# Altium PCB MB_SpectrumAnalyzerB.PcbDoc (part 2 of 3)
Units mil, origin at the board's own origin, x right, y up, seen from the top; angles counter-clockwise.
Board outline 6149 x 3004 mil, 2 copper layers (Top Layer, Bottom Layer); 237 components, 180 nets, 644 pads, 101 vias.
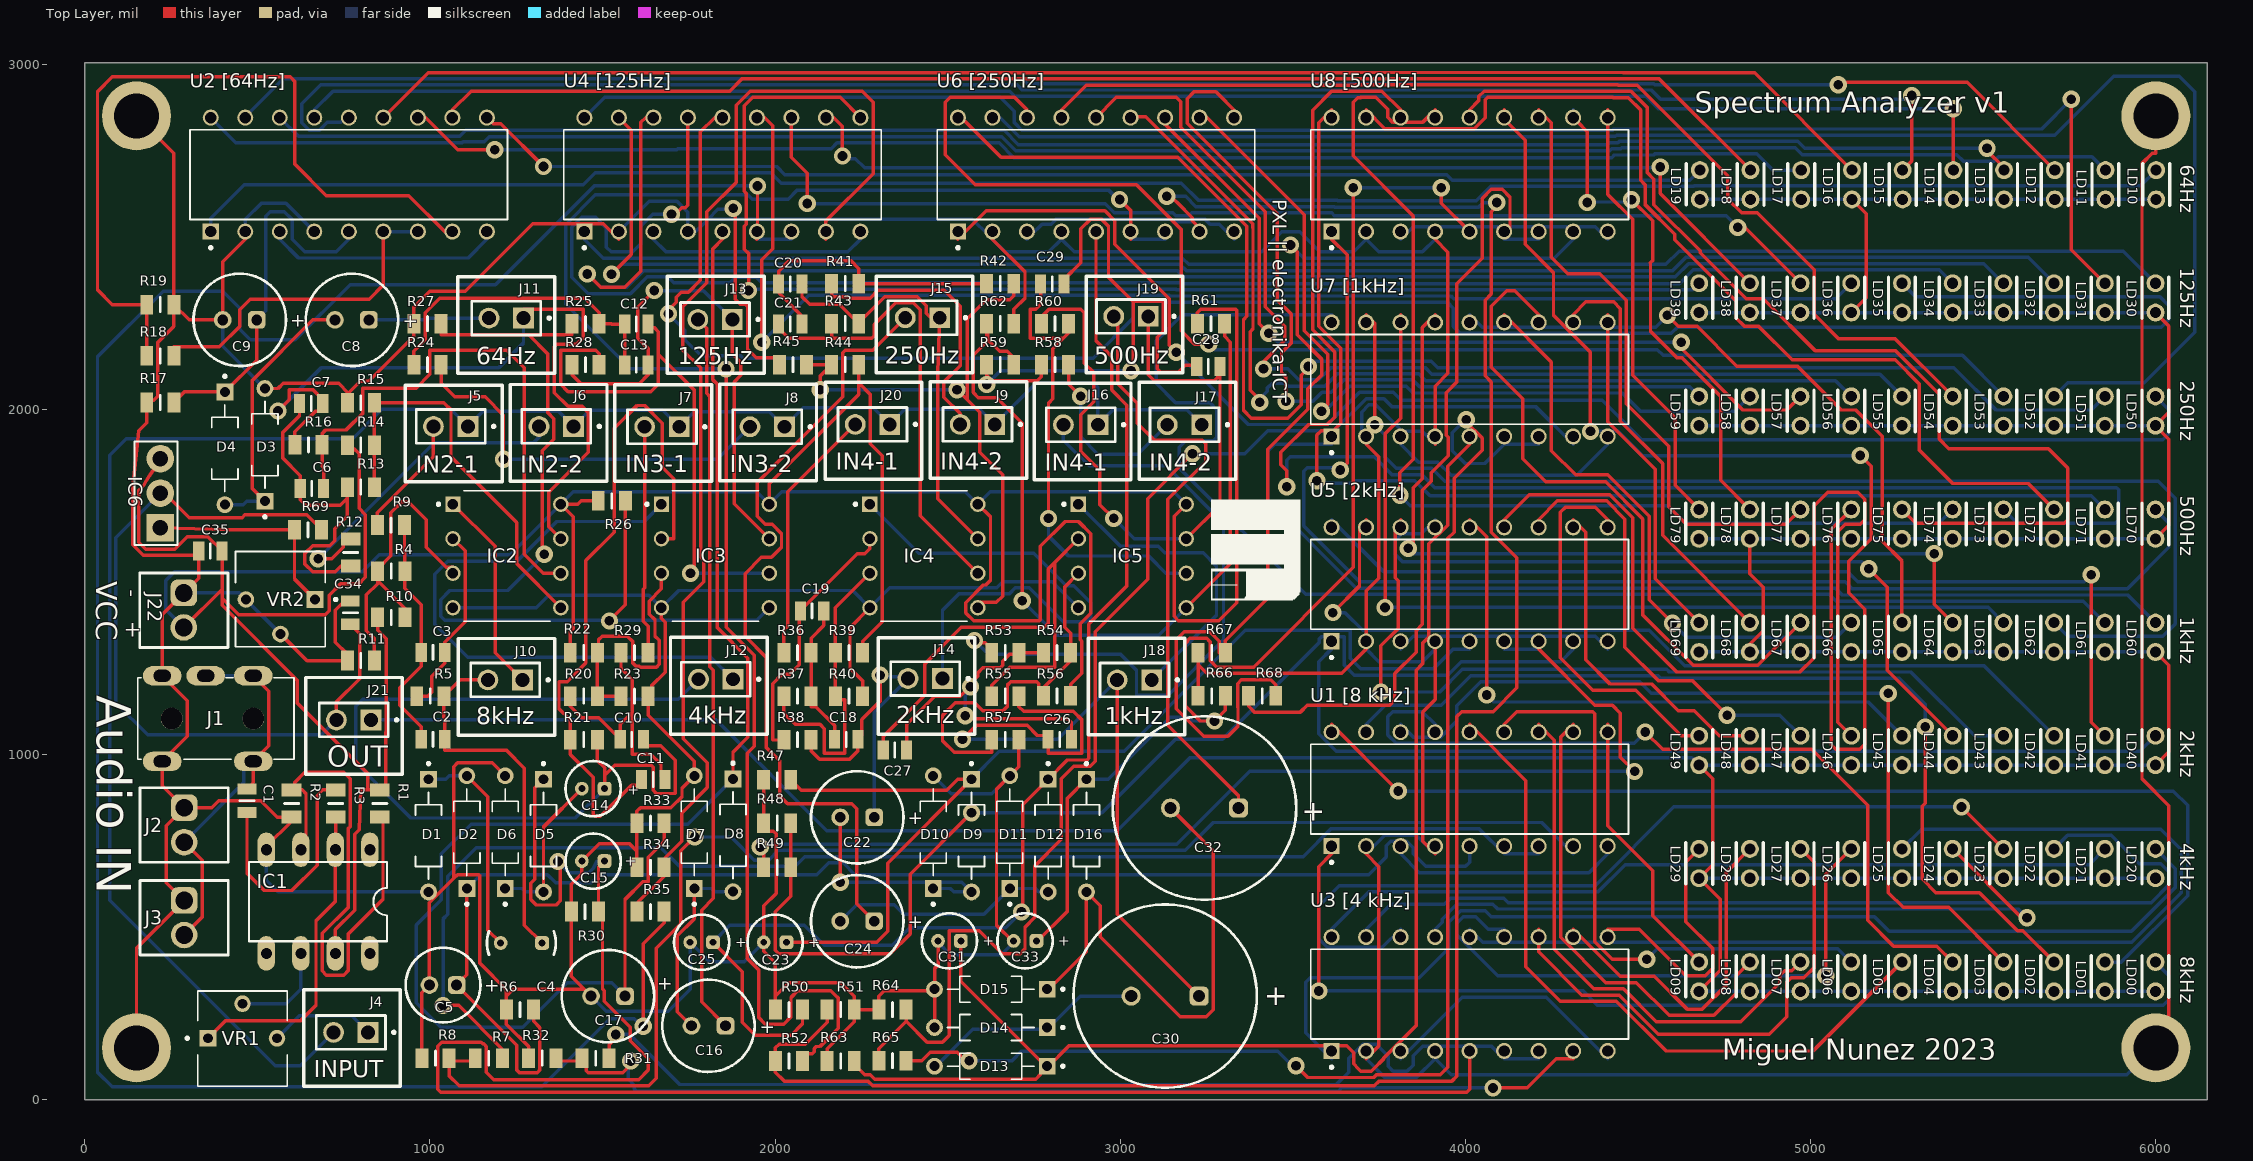
[diagram p0: Top Layer view]

## Via types
v1: diameter 50, hole 28, Top Layer to Bottom Layer, 101 vias

## Nets (pads, with @x,y where several pads share a name; then routed paths per layer and width w, separated by ;. In a path a pad name is that pad's centre, name@x,y a point inside that pad or via, vN(x,y) a via of type N, cw(c..) or ccw(c..) an arc to the next point about the centre after c; other vN are vias at no path point) (continued)
GND: (continued)
  Bottom Layer w10: J22.1@287,1468 448,1468 VR2.3@467,1449 VR2.2@567,1349 ; C9.2@399.79,2259 399.79,2182.44 D3.A@522,2060.23 ; 465,2515 465,2550 512,2597 583,2597 665,2515 ; IC1.4@526,724 526,635.77 560,601.77 D1.A@996,601.77 ; IC2.4@1066.7,1425 1308,1425 1344,1461 1634.7,1461 IC3.4@1670.7,1425 1720.7,1475 2224.7,1475 IC4.4@2274.7,1425 2332.7,1483 2642,1483 2660,1501 2802.7,1501 IC5.4@2878.7,1425 ; C17.2@1466.79,300 1510.79,256 1690,256 1754,320 C25.2@1754,456 1810,400 1911,400 C23.2@1967,456 ; 1558.58,2503.75 1558.58,2526.25 1635.33,2603 1715.74,2603 1747.33,2571.41 1747.33,2515 1747.33,2492.5 1758.58,2503.75 1805.83,2551 ; v1(1879,2582) 1876.17,2579.17 1834,2579.17 1805.83,2551 ; D10.A@2458,938.23 2510.23,886 2627.77,886 D11.A@2680,938.23 ; C31.2@2472,456 2508,420 2655,420 C33.2@2691,456 ; 3712,118.5 3766.23,64.27 3857.77,64.27 3912,118.5 3958.5,72 5915.37,72 5993.37,150 pad.29@6000,150 ; 3712,712 3766.23,766.23 3857.77,766.23 3912,712 ; 3712,1305.5 3748.5,1269 3875.5,1269 3912,1305.5 ; 3712,1899 3712,1925.23 3699,1938.23 3699,1992 3720,2013 3740.23,2013 3817.23,1936 3875,1936 3912,1899 ; 3912,2492.5 3875.5,2456 3748.5,2456 3712,2492.5 3675.77,2456.27 3577.73,2456.27 3520,2514 3468,2514 3410,2456 2866.17,2456 2829.67,2492.5 2793.17,2456 2666.17,2456 2629.67,2492.5 2618.42,2503.75 2571.17,2551 2558.51,2551 2558.28,2551.23 1832.33,2551.23 1832.1,2551 1805.83,2551
NetC1_1: C1.1 J1.3 J1.4_1 J1.4_2 J2.2 J3.2 | length 1156.4
  Top Layer w10: J3.2@287.93,477 340,529.07 340,693.79 J2.2@287.93,745.86 ; C1.1@470,899.73 488.27,918 J1.4_2@488.27,979.98 533,1024.72 533,1183.28 J1.4_1@488.27,1228.02
  Bottom Layer w10: J2.2@287.93,745.86 460,917.92 460,979.98 J1.4_2@488.27,979.98 ; J1.3@350.47,1228.02 J1.4_1@488.27,1228.02
NetC1_2: C1.2 R3.1 | length 692.4
  Top Layer w10: C1.2@470,832.02 470,656 520,606 600,606 673,679 673,880.37 690,897.37 R3.1@727.06,897.37
NetC2_1: C2.1 C3.1 R4.2 R9.2 | length 693.1
  Top Layer w10: R9.2@926.37,1664.67 926.37,1598 927.37,1597 R4.2@927.37,1531.09 927.37,1482 975.14,1434.23 C3.1@975.14,1296 975.14,1256.14 912.05,1193.05 912.05,1143.09 975.14,1080 C2.1@975.14,1044
NetC2_2: C2.2 C4.1 J10.02 R5.2 | length 1084.8
  Top Layer w10: J10.02@1168,1216 1087.5,1216 R5.2@1040.5,1169 1040.5,1107.36 1042.86,1105 C2.2@1042.86,1044 1042.86,1011.63 1222,1011.63 1273.63,960 1273.63,505.37 C4.1@1325,454
NetC3_2: C3.2 IC2.2 R5.1 | length 547.6
  Top Layer w10: R5.1@961.76,1169 994,1169 1005,1180 1005,1226.14 1042.86,1264 C3.2@1042.86,1296 1042.86,1325 1102,1384.14 1102,1589.7 IC2.2@1066.7,1625
NetC4_2: C4.2 D1.C D2.A | length 640
  Top Layer w10: D2.A@1107,938.23 1167.67,877.55 1167.67,491.33 C4.2@1205,454
  Bottom Layer w10: D1.C@996,928.23 1046,928.23 1056,938.23 D2.A@1107,938.23
NetC5_1: "U1 [8 kHz].5" C5.1 D2.C R6.2 | length 3963.3
  Top Layer w10: D2.C@1107,611.77 1107,361.63 C5.1@1077.37,332 1252,157.37 1252,85.86 1259.4,78.45 1310.6,78.45 1318,85.86 1318,209 1300.37,226.63 R6.2@1300.37,261
  Bottom Layer w10: D2.C@1107,611.77 1147.23,652 1340.65,652 1364,628.65 1467.65,628.65 1491,652 2120.96,652 2155,686.04 2196.96,686.04 2231,652 3720,652 3771,703 3771,736 3783.23,748.23 3830,748.23 3848.23,730 3848.23,712 3884.46,675.77 4000,675.77 4012,687.77 4012,712
NetC6_1: C6.1 IC2.6 R16.2 | length 1619.5
  Top Layer w10: C6.1@691.86,1771 691.86,1831 687.5,1835.36 R16.2@687.5,1897 687.5,1930 697.5,1940 757,1940 806,1989 806,2061 960,2061 1000,2101 1000,2171 1222,2171 1273,2120 1273,1580 1328,1525 IC2.6@1379.3,1525
NetC6_2: C6.2 C7.2 R12.1 R13.2 | length 924.1
  Top Layer w10: C7.2@622.14,2016.88 622.14,1981.14 573,1932 573,1859.14 624.14,1808 C6.2@624.14,1771 624.14,1737.86 640,1722 740,1722 760.63,1742.63 ; R13.2@760.63,1774.33 760.63,1742.63 ; R12.1@770.47,1545.63 741.78,1545.63 725.15,1529 660,1529 638,1551 638,1583.29 660,1605.29 710,1605.29 724.5,1619.79 724.5,1653.5 760.63,1689.63 760.63,1742.63
NetC7_1: C7.1 IC2.7 J11.01 R16.1 | length 2286.7
  Top Layer w10: v1(560,1995) 592.8,2027.8 592.8,2057.24 660.61,2057.24 689.86,2028 C7.1@689.86,2016.88 689.86,1995 668.76,1995 608.76,1935 R16.1@608.76,1897 ; J11.01@1271.13,2264.33 1271.13,2290 1444,2290 1444,2208 1424.73,2188.73 1366.72,2188.73 1360,2182 1360,2048.28 1400,2008.28 1440.96,2008.28 1459.25,1990 1459.25,1875.25 1344,1760 1344,1660.3 IC2.7@1379.3,1625
  Bottom Layer w10: v1(560,1995) 686,2121 1200,2121 1271.13,2192.13 J11.01@1271.13,2264.33
NetC8_1: C8.2 D3.C D4.A | length 797.7
  Top Layer w10: D3.C@522,1733.77 484.63,1771.14 484.63,2082.63 661,2259 C8.2@724.79,2259
  Bottom Layer w10: D4.A@406,1723.77 459,1723.77 469,1733.77 D3.C@522,1733.77
NetC8_2: C8.1 J11.02 | length 350.1
  Bottom Layer w10: C8.1@823.21,2259 994,2259 999.33,2264.33 J11.02@1171.13,2264.33
NetC9_1: "U2 [64Hz].5" C9.1 D4.C R17.2 | length 1083.6
  Top Layer w10: R17.2@258.37,2020 288.6,2050.23 D4.C@406,2050.23 498.21,2142.44 C9.1@498.21,2259
  Bottom Layer w10: C9.1@498.21,2259 498.21,2259.66 524,2285.45 524,2558.93 537.07,2572 569,2572 569.86,2572.86 578.14,2572.86 601.23,2549.77 601.23,2517.5 601.23,2493 637.96,2456.27 728.77,2456.27 765,2492.5 765,2515
NetC10_1: C10.1 C11.1 R20.2 R29.2 | length 757.1
  Top Layer w10: R20.2@1406.63,1169 1406.63,1139.37 1440,1106 1489.14,1106 C10.1@1551.14,1044 1551.14,1087 1586,1121.86 ; R29.2@1553.5,1294.82 1553.5,1249.5 1586,1217 1586,1121.86 ; C11.1@1680.73,928 1669.39,939.34 1669.39,971.61 1640,1001 1586,1001 1586,1121.86
NetC10_2: C10.2 C14.1 J12.02 R21.2 | length 2677
  Top Layer w10: R21.2@1485.37,1042.82 1485.37,981.63 1506,961 1506,940 ; C14.1@1506,901 1506,940 ; C10.2@1618.86,1044 1618.86,1025 1669,1025 1711,983 1711,887 1656,887 1647,896 1647,963.14 1641.14,969 1535,969 1506,940
  Bottom Layer w10: C14.1@1506,901 1421,816 945,816 785,976 785,1140 805,1160 1720,1160 J12.02@1778,1218
NetC11_2: C11.2 IC3.2 R21.1 | length 2007.6
  Top Layer w10: C11.2@1613.02,928 1613.02,911 1584,911 1494,821 1478.86,821 1473,826.86 1473,933.63 1406.63,1000 R21.1@1406.63,1042.82 1406.63,1100.37 1374,1133 1374,1211 1398,1211 1452,1265 1452,1562 1534,1644 1534,1945 1600,2011 1622,2011 1673,1960 1673,1832 1706,1799 1706,1625 IC3.2@1670.7,1625
NetC12_1: C12.1 IC3.6 R28.2 | length 1654.2
  Top Layer w10: R28.2@1490.37,2129.18 1490.37,2160.36 1480,2170.73 1379,2170.73 1379,2072 1400,2051 1640,2051 1662,2073 1662,2160 ; C12.1@1631.86,2246.82 1631.86,2237 1650,2237 1662,2225 1662,2160 ; v1(1755,1525) 1766,1536 1766,2056 1662,2160
  Bottom Layer w10: v1(1755,1525) IC3.6@1983.3,1525
NetC12_2: C12.2 C13.2 R24.1 R25.2 | length 927.9
  Top Layer w10: R24.1@953.63,2129.18 953.63,2168 987,2201.37 987,2280 1029,2322 1448.37,2322 1490.37,2280 R25.2@1490.37,2248 1526,2248 1527.18,2246.82 C12.2@1564.14,2246.82 C13.2@1564.14,2128
NetC13_1: C13.1 IC3.7 J13.01 R28.1 | length 1503.9
  Top Layer w10: R28.1@1411.63,2129.18 1411.63,2100 1437.63,2074 1605.86,2074 1631.86,2100 C13.1@1631.86,2128 1631.86,2176.14 1602,2206 1602,2296 v1(1650,2344) ; J13.01@1876.13,2260.33 1876.13,2160.63 1901,2135.76 1901,2098.55 1881.45,2079 1881.45,1726.84 IC3.7@1983.3,1625
  Bottom Layer w10: v1(1650,2344) 1792.46,2344 J13.01@1876.13,2260.33
NetC14_2: C14.2 D5.A D6.C | length 460.3
  Top Layer w10: D5.A@1329,601.77 1329,790 C14.2@1440,901
  Bottom Layer w10: D6.C@1218,611.77 1268,611.77 1278,601.77 D5.A@1329,601.77
NetC15_1: "U3 [4 kHz].5" C15.1 D5.C R30.2 | length 5339.2
  Top Layer w10: D5.C@1329,928.23 1304,903.23 1304,639 1291.63,626.63 1291.63,580 1307.63,564 1366,564 1378,576 1378,683 v1(1371,690) ; C15.1@1506,691 1488.37,673.37 1488.37,535.16 1500,523.53 1500,321.36 1505.38,315.98 1505.38,284.62 1580,210 1580,171 1633,118 1633,86 1605,58 1185,58 1163,80 1163,151 1163,153.93 1155.38,161.54 1152.46,161.54 1148,166 1034,166 1023,155 1023,30.72 1031.72,22 4003.28,22 4012,30.72 4012,118.5
  Bottom Layer w10: v1(1371,690) 1403,658 1461,658 1473,670 1484,691 C15.1@1506,691
NetC16_1: C16.2 D7.C D8.A | length 550.7
  Top Layer w10: C16.2@1757.79,214 1717,254.79 1717,474.38 1766,523.38 D7.C@1766,611.77
  Bottom Layer w10: D7.C@1766,611.77 1817,611.77 1826,602.77 D8.A@1878,602.77
NetC16_2: C16.1 J13.02 | length 2108
  Top Layer w10: J13.02@1776.13,2260.33 1802,2234.46 1802,2046 1811,2037 1811,1254 1821.37,1243.63 1821.37,583.37 1787,549 1787,283.21 C16.1@1856.21,214
NetC17_1: "U4 [125Hz].5" C17.1 D8.C R33.2 | length 4291.8
  Top Layer w10: C17.1@1565.21,300 1565.21,580 1616.21,631 1632,631 1632,702.63 1678.37,749 R33.2@1678.37,801.12 ; 1847.33,2492.5 1820,2465.17 1820,2085 1833,2072 1833,1367.24 1921.12,1279.12 1921.12,1050.11 1878,1006.99 D8.C@1878,929.23
  Bottom Layer w10: C17.1@1565.21,300 1526.21,339 1398,339 1269,210 1031,210 960,281 960,506 1033.37,579.37 1033.37,712 1119.37,798 1746.77,798 D8.C@1878,929.23
NetC18_1: C18.1 C19.1 R36.2 R37.2 | length 423.4
  Top Layer w10: C19.1@2140.98,1416 2140.98,1373.61 2104.37,1337 R36.2@2104.37,1294.82 R37.2@2104.37,1169 2104.37,1138 2118.27,1138 2172.27,1084 C18.1@2172.27,1044
NetC18_2: C18.2 C22.1 J14.02 R38.2 | length 962.8
  Top Layer w10: R38.2@2104.37,1042.82 2104.37,1010 2128.73,985.64 2215.62,985.64 2239.98,1010 C18.2@2239.98,1044 2251.32,1055.34 2251.32,1101.32 2304,1154 v1(2304,1230)
  Bottom Layer w10: C22.1@2287.21,818 2287.21,1122.21 J14.02@2385,1220 2380,1225 2309,1225 v1(2304,1230)
NetC19_2: C19.2 IC4.2 R38.1 | length 758.7
  Top Layer w10: R38.1@2025.63,1042.82 2025.63,1042 1993,1042 1993,1205 2020,1232 2042,1232 2070,1260 2070,1401.73 2073.27,1405 C19.2@2073.27,1416 2238.27,1581 2260,1581 2274.7,1595.7 IC4.2@2274.7,1625
NetC20_1: C20.1 IC4.7 J15.01 R43.1 | length 1228.5
  Top Layer w10: C20.1@2077.86,2362.82 2077.86,2326.6 2100,2304.45 2185.92,2304.45 R43.1@2240.64,2249.73 ; R43.1@2242.37,2248 R43.1@2240.64,2249.73 ; IC4.7@2587.3,1625 2471,1741.3 2471,2106.87 J15.01@2477.13,2265.33 2450.67,2265.33 2438.25,2277.75 2438.25,2300 2411.8,2326.45 2317.35,2326.45 R43.1@2240.64,2249.73
NetC20_2: C20.2 C21.2 R41.1 R42.2 | length 849.1
  Top Layer w10: C21.2@2077.86,2246.82 2077.86,2270 2010.14,2337.72 C20.2@2010.14,2362.82 2010.14,2400.14 2040,2430 2220,2430 2242.37,2407.63 R41.1@2242.37,2364 R42.2@2612.63,2364
NetC21_1: C21.1 IC4.6 R43.2 | length 1378.2
  Top Layer w10: C21.1@2010.14,2246.82 2010.14,2235 2039.14,2206 2163.63,2206 ; R43.2@2163.63,2248 2163.63,2206 ; IC4.6@2587.3,1525 2420.25,1692.05 2420.25,2288.2 2400,2308.45 2350,2308.45 2287.1,2245.55 2287.1,2213.1 2280,2206 2163.63,2206
NetC22_2: C22.2 D9.A D10.C | length 694.9
  Top Layer w10: v1(2188.79,630.21) C22.2@2188.79,818
  Bottom Layer w10: v1(2188.79,630.21) 2540.56,630.21 D9.A@2569,601.77 2518,601.77 2508,611.77 D10.C@2458,611.77
NetC23_1: "U5 [2kHz].5" C23.1 D9.C R47.2 | length 3136.1
  Top Layer w10: C23.1@2033,456 2294,456 2326,488 2326,685.23 D9.C@2569,928.23 2529.23,928.23 2497,896 2076.19,896 R47.2@2045.37,926.82
  Bottom Layer w10: D9.C@2569,928.23 2649.77,1009 3011.57,1009 3362.3,1359.73 3666.23,1359.73 3666.23,1278.77 3697,1248 3907.33,1248 3964.83,1305.5 4012,1305.5
NetC24_1: C24.2 D11.C D12.A | length 668.8
  Bottom Layer w10: C24.2@2188.79,517 2236.79,565 2345,565 2373,537 2605.23,537 D11.C@2680,611.77 2753,611.77 2763,601.77 D12.A@2791,601.77

## Text inside footprints (layer, text, board x,y; h text height)
C5: Top Overlay "+" at 1158.08,312.31 h39.37
C8: Top Overlay "+" at 922,2237 h39.37
C9: Top Overlay "+" at 594.67,2239.32 h39.37
C14: Top Overlay "+" at 1573,884 h30
C15: Top Overlay "+" at 1565,678 h30
C16: Top Overlay "+" at 1955,192 h39.37
C17: Top Overlay "+" at 1658,318 h39.37
C22: Top Overlay "+" at 2383.67,798.32 h39.37
C23: Top Overlay "+" at 2096,442 h30
C24: Top Overlay "+" at 2383.67,497.31 h39.37
C25: Top Overlay "+" at 1884,442 h30
C30: Top Overlay "+" at 3416.43,274 h59.06
C31: Top Overlay "+" at 2601,446 h30
C32: Top Overlay "+" at 3526,808 h59.06
C33: Top Overlay "+" at 2821,446 h30